# EAGLE board TecSupply (EAGLE 6.2)
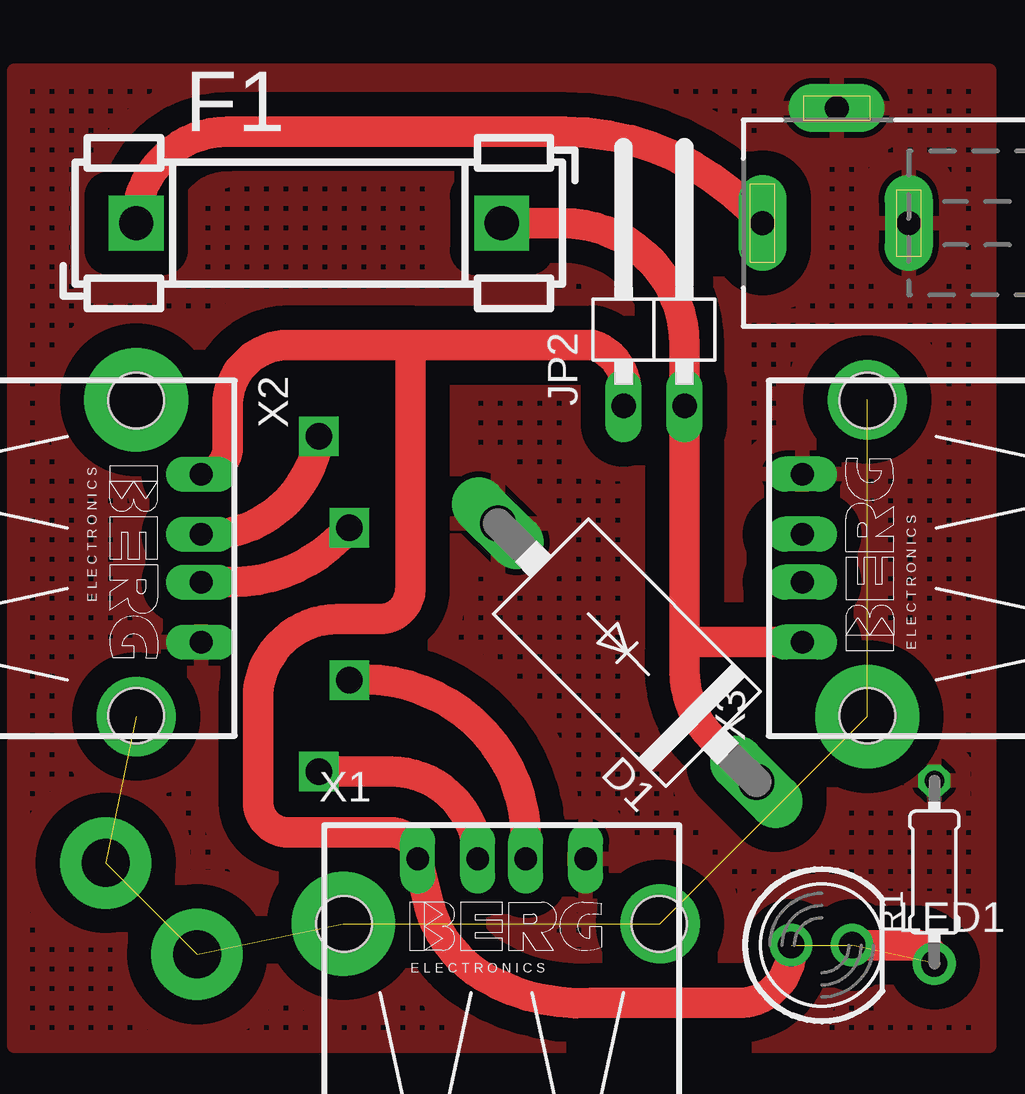
[diagram p0: board, top side]
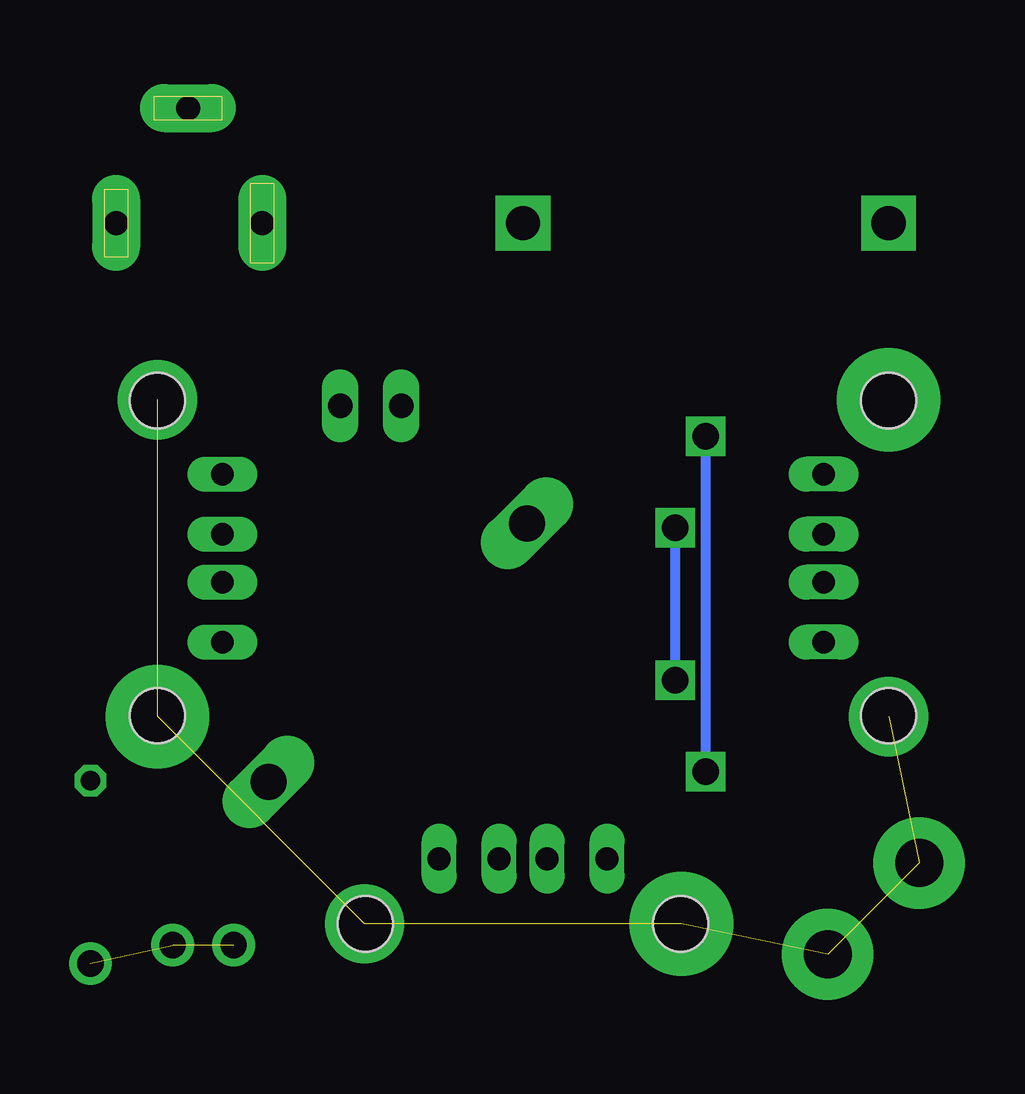
[diagram p1: board, bottom side, seen from below]

No outline drawn. Coordinates in mm, seen from the top.
Copper layers (1*16): Top 0.035mm / dielectric 1.5mm / Bottom 0.035mm
Design rules: minimum track width 10mil, minimum drill 24mil, track to track 8mil, track to pad 8mil, pad to pad 8mil, via to via 8mil, smd to smd 8mil, copper to edge 40mil, drill to drill 8mil, minimum pad ring 10mil, minimum via ring 8mil, stop-mask expansion 4mil, vias tented up to drill 0mil, thermal gap 10mil

## Footprints (pad centres in the part's own frame; a part is rotated, then mirrored left to right if it is on the bottom)
DO201-15 = drill 1.499 long: A 7.62,0; C -7.62,0
FUSE_HOLDER_5X20MM = drill 1.422 pad 2.286 square: 1 0,0; 2 15.24,0
DCJ0303 = drill 1 pad 2 long: 1 0,3.1; 2 4.8,0; 3 0,-3
1X02/90 = drill 1.016 long: 1 -1.27,-3.81; 2 1.27,-3.81
LED5MM = drill 0.813 octagon: A -1.27,0; K 1.27,0
0204/7 = drill 0.813 octagon: 1 -3.81,0; 2 3.81,0
PN87520 = drill 0.95 long: 1 -3.5,2.71; 2 -1,2.71; 3 1,2.71; 4 3.5,2.71 | hole 2.3: -6.57,0; 6.57,0

## Placement (x,y rotation side)
D1  1N5400  [DO201-15]  26.82,17.65 135 top
F1  FUSEBLANK_5X20MM  [FUSE_HOLDER_5X20MM]  6.35,35.56 0 top
J1  [DCJ0303]  35.56,35.56 90 top
JP2  [1X02/90]  27.94,31.75 0 top
LED1  [LED5MM]  34.92,5.46 0 top
R1  12  [0204/7]  39.62,8.51 90 top
X1  [PN87520]  21.59,6.35 0 top
X2  [PN87520]  6.35,21.59 270 top
X3  [PN87520]  36.83,21.59 90 top

## Library data of the parts
D1 = diode
F1 = fuse; OC_FARNELL: unknown; OC_NEWARK: unknown
J1 = con-jack; OC_FARNELL: unknown; OC_NEWARK: unknown
JP2 = pinhead
LED1 = led
R1 = resistor
X1-X3 = con-berg; OC_FARNELL: unknown; OC_NEWARK: unknown

## Nets
GND: D1.A J1.2 J1.3 R1.2 X1.4 X2.4 X3.4
N$1: F1.1 J1.1
N$2: JP2.1 LED1.A X1.1 X2.1
N$3: X1.2 X2.2
N$4: X1.3 X2.3
N$6: D1.C F1.2 JP2.2 X3.1
N$8: LED1.K R1.1

## Tracks (layer width: path | path; a pad name or v marks a point on that pad's centre or on a via)
GND
  pour Top (isolate 1.016, hatched): 1.27,41.91 41.91,41.91 41.91,1.27 1.27,1.27
N$1
  Top 1.27: F1.1 arc-90 10.16,39.37 24.2,39.37 arc-50 J1.1
N$2
  Top 1.27: JP2.1 arc90 25.4,30.48 17.78,30.48 | 17.78,30.48 17.78,20.32 arc-90 16.51,19.05 14.74,19.05 arc90 11.43,15.74 11.43,11.43 arc90 12.7,10.16 16.99,10.16 arc-90 X1.1 18.56,7.13 arc43 20.8,4.16 arc34 25.33,3.05 31.62,3.05 arc90 LED1.A | 17.78,30.48 12.7,30.48 arc90 10.16,27.94 10.16,26.19 arc-90 X2.1
N$3  (via drill 1.1)
  Top 1.27: X1.2 arc90 16.95,12.7 v13.97,12.7 | X2.2 8.62,22.59 arc90 v13.97,26.67
  Bottom 0.406: v13.97,12.7 v13.97,26.67
N$4  (via drill 1.1)
  Top 1.27: X1.3 22.59,10.43 arc90 v15.24,16.51 | X2.3 10.31,20.59 arc45 14.85,22.47 v15.24,22.86
  Bottom 0.406: v15.24,16.51 v15.24,22.86
N$5  (via drill 2 pad 3.81, 2.29 pad 3.05, 2.29 pad 4.32)  (6 unrouted)
  other vias: 5.08,8.89 8.89,5.08 14.99,6.35 28.19,6.35 36.83,14.99 6.35,14.99 36.83,28.19
N$6
  Top 1.27: F1.2 24.13,35.56 arc-90 29.21,30.48 JP2.2 29.21,17.78 | D1.C 32.19,12.27 30.39,14.06 arc-45 29.21,16.9 29.21,17.78 | X3.1 29.52,18.09 29.21,17.78
N$7  (via drill 2.29 pad 4.32)
  other vias: 6.35,28.19
N$8
  Top 1.27: R1.1 arc90 38.86,5.46 LED1.K
N$9  (via drill 1.1 pad 1.78)  (2 unrouted)
  other vias: 33.66,5.46 36.2,5.46 39.62,4.7